# EAGLE board fabpdi-t90usb_v1.1 (EAGLE 8.2.2)
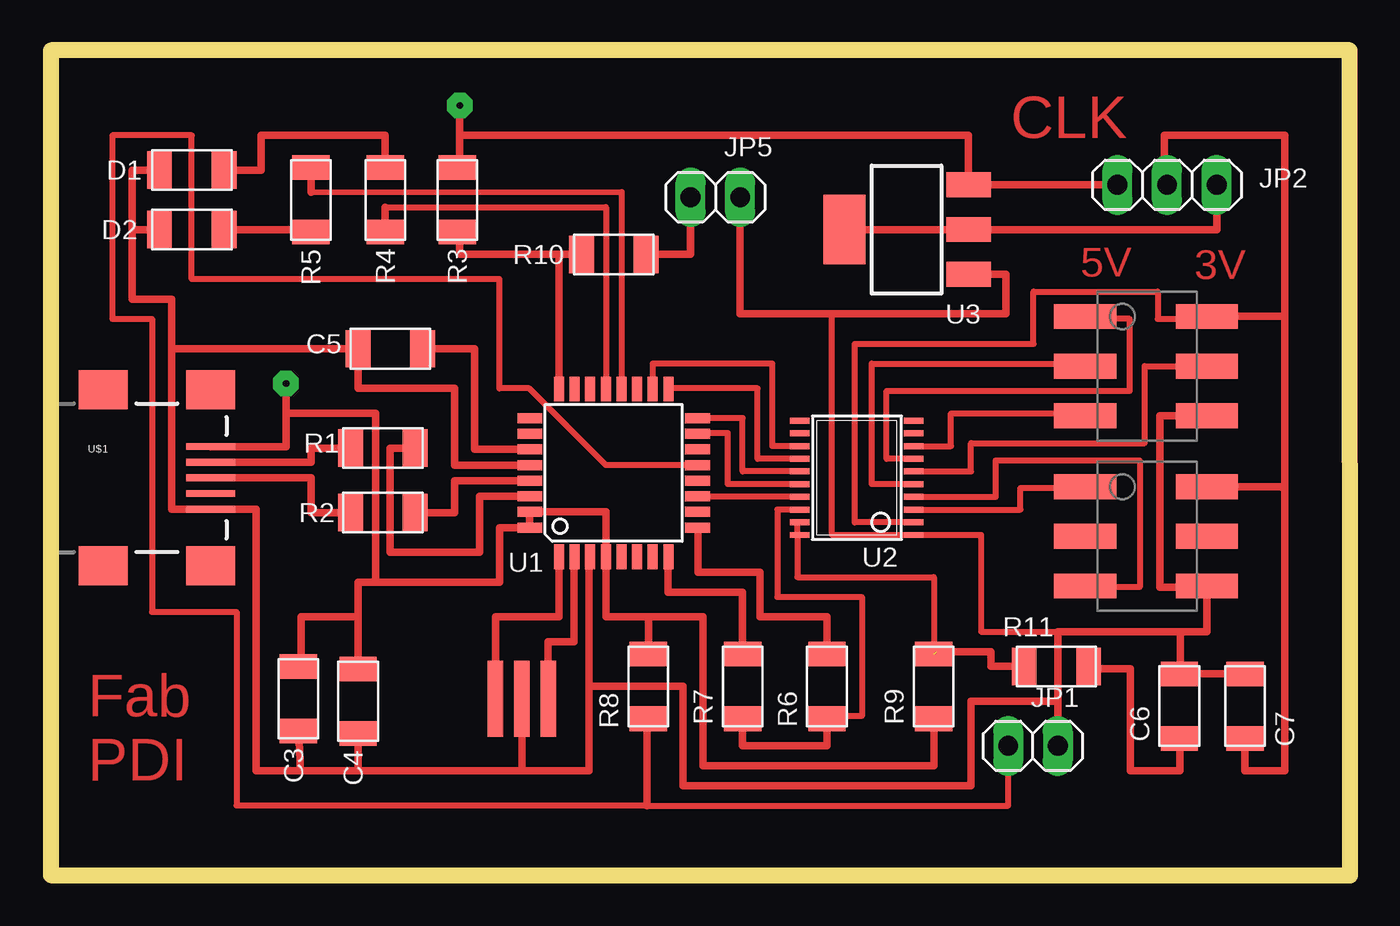
[diagram p0: board, top side]
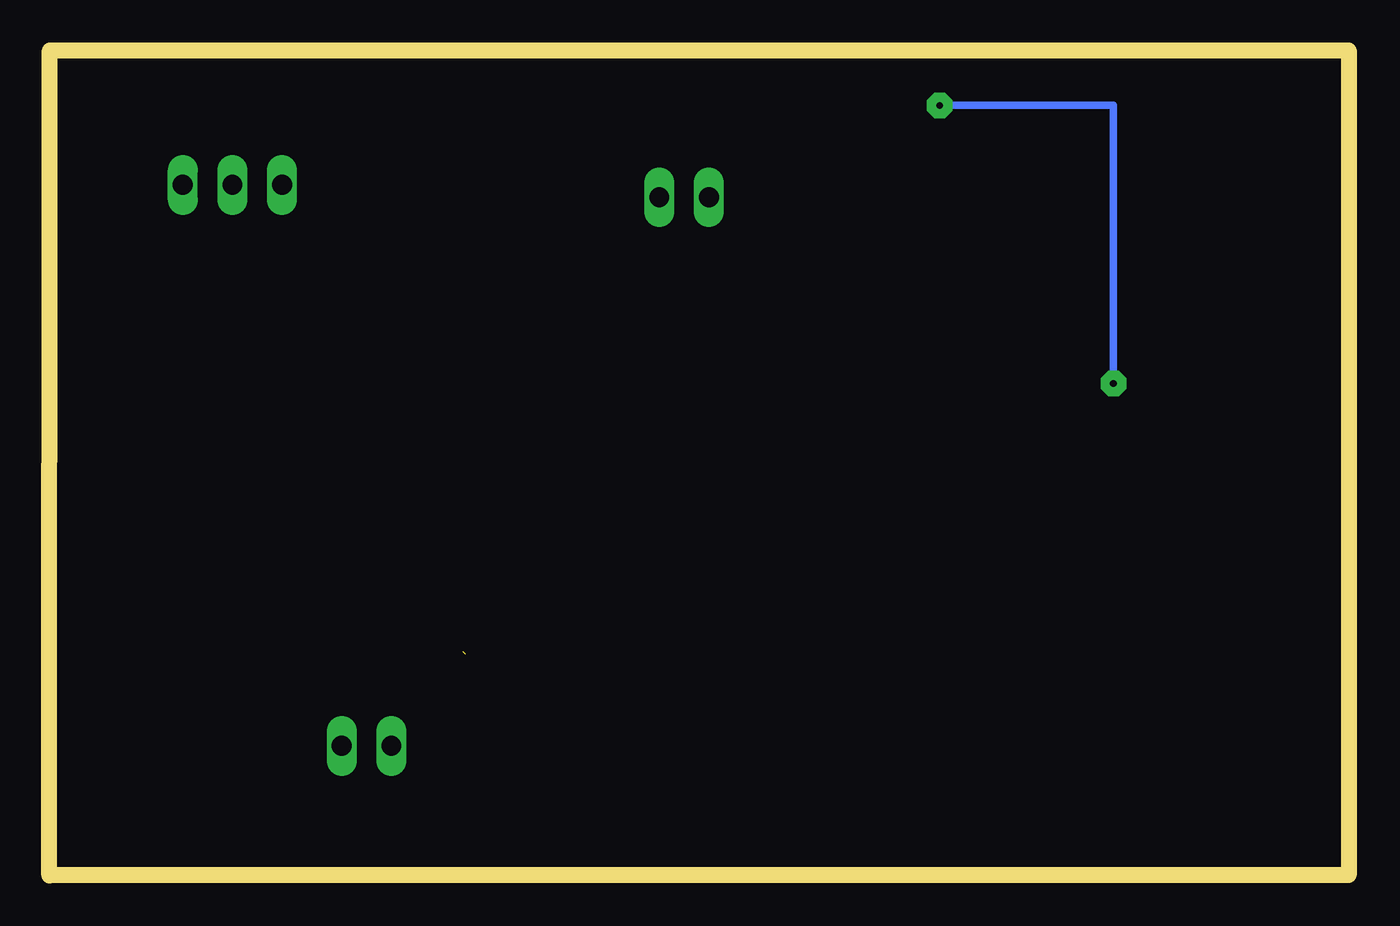
[diagram p1: board, bottom side, seen from below]

Size 66.5 x 42.21 mm. Coordinates in mm from the lower left corner, seen from the top.
Outline: 0,0.02 66.5,0 66.48,42.21 0,42.21 0,0.02
Copper layers (1*16): Top 0.035mm / dielectric 1.5mm / Bottom 0.035mm
Design rules "default *": minimum track width 6mil, minimum drill 0.35mm, track to track 10mil, track to pad 10mil, pad to pad 10mil, via to via 10mil, smd to smd 8mil, copper to edge 40mil, drill to drill 6mil, minimum pad ring 10mil, minimum via ring 8mil, stop-mask expansion 4mil, vias tented up to drill 0mil, thermal gap 10mil

## Footprints (pad centres in the part's own frame; a part is rotated, then mirrored left to right if it is on the bottom)
C1206FAB = smd 1.27 x 1.905: 1 -1.651,0; 2 1.651,0
LED1206FAB = smd 1.27 x 1.905: 1 -1.651,0; 2 1.651,0
1X02 = drill 1.016 long: 1 -1.27,0; 2 1.27,0
1X03 = drill 1.016 long: 1 -2.54,0; 2 0,0; 3 2.54,0
2X03SMD-FAB = smd 3.175 x 1.27: 1 -2.794,2.54; 2 3.429,2.54; 3 -2.794,0; 4 3.429,0; 5 -2.794,-2.54; 6 3.429,-2.54
R1206FAB = smd 1.27 x 1.905: 1 -1.651,0; 2 1.651,0
TQFP32-08 = smd 1.27 x 0.508: 1 -4.293,2.8; 2 -4.293,2; 3 -4.293,1.2; 4 -4.293,0.4; 5 -4.293,-0.4; 6 -4.293,-1.2; 7 -4.293,-2; 8 -4.293,-2.8; 17 4.293,-2.8; 18 4.293,-2; 19 4.293,-1.2; 20 4.293,-0.4; 21 4.293,0.4; 22 4.293,1.2; 23 4.293,2; 24 4.293,2.8 | smd 0.508 x 1.27: 9 -2.8,-4.293; 10 -2,-4.293; 11 -1.2,-4.293; 12 -0.4,-4.293; 13 0.4,-4.293; 14 1.2,-4.293; 15 2,-4.293; 16 2.8,-4.293; 25 2.8,4.293; 26 2,4.293; 27 1.2,4.293; 28 0.4,4.293; 29 -0.4,4.293; 30 -1.2,4.293; 31 -2,4.293; 32 -2.8,4.293
TSSOP20 = smd 0.305 x 0.991: 1 -2.925,-2.918; 2 -2.275,-2.918; 3 -1.625,-2.918; 4 -0.975,-2.918; 5 -0.325,-2.918; 6 0.325,-2.918; 7 0.975,-2.918; 8 1.625,-2.918; 9 2.275,-2.918; 10 2.925,-2.918; 11 2.925,2.918; 12 2.275,2.918; 13 1.625,2.918; 14 0.975,2.918; 15 0.325,2.918; 16 -0.325,2.918; 17 -0.975,2.918; 18 -1.625,2.918; 19 -2.275,2.918; 20 -2.925,2.918
SOT-223 = smd 1.27 x 2.286: 1 -2.286,-3.175; 2 0,-3.175; 3 2.286,-3.175 | smd 3.556 x 2.159: TER 0,3.175
USB_MINI = smd 2.5 x 0.35: D+ 3.77,0; D- 3.77,0.8; GND 3.77,-1.6; ID 3.77,-0.8; VBUS 3.77,1.6 | smd 2.5 x 2: SHIELD@1 -1.73,-4.5; SHIELD@2 -1.73,4.5; SHIELD@3 3.77,4.5; SHIELD@4 3.77,-4.5
EFOBM = smd 0.8 x 3.9: 1 -1.35,0; 2 0,0; 3 1.35,0

## Placement (x,y rotation side)
C3  0.1u  [C1206FAB]  12.67,9.04 90 top
C4  10u  [C1206FAB]  15.72,8.91 90 top
C5  1u  [C1206FAB]  17.37,26.94 0 top
C6  0.1u  [C1206FAB]  57.76,8.66 270 top
C7  0.1u  [C1206FAB]  61.11,8.66 270 top
D1  red  [LED1206FAB]  7.21,36.09 180 top
D2  green  [LED1206FAB]  7.21,33.04 180 top
JP1  [1X02]  50.27,6.62 180 top
JP2  [1X03]  57.12,35.33 0 top
JP3  ISP  [2X03SMD-FAB]  55.73,26.05 0 top
JP4  PDI  [2X03SMD-FAB]  55.73,17.34 0 top
JP5  [1X02]  34.01,34.69 0 top
R1  49  [R1206FAB]  16.99,21.86 0 top
R2  49  [R1206FAB]  16.99,18.56 0 top
R3  10k  [R1206FAB]  20.8,34.56 90 top
R4  1k  [R1206FAB]  17.12,34.56 90 top
R5  1k  [R1206FAB]  13.31,34.56 270 top
R6  49  [R1206FAB]  39.73,9.67 270 top
R7  49  [R1206FAB]  35.41,9.67 270 top
R8  1k  [R1206FAB]  30.58,9.67 90 top
R9  100k  [R1206FAB]  45.19,9.67 270 top
R10  0  [R1206FAB]  28.8,31.77 180 top
R11  0  [R1206FAB]  51.46,10.69 180 top
U1  AT90USB162A  [TQFP32-08]  28.8,20.59 90 top
U2  GTL2003PW  [TSSOP20]  41.25,20.34 90 top
U3  AMS1117-3.3  [SOT-223]  43.79,33.04 90 top
U$1  USB_MINI  [USB_MINI]  4.42,20.34 0 top
X1  16MHz  [EFOBM]  24.1,9.04 0 top

## Library data of the parts
C3-C7 D1 D2 JP3 JP4 R1-R11 U$1 X1 = 00fab
JP1 JP2 JP5 = pinhead
U1 = adafruit
U2 = gtl2003
U3 = Seeed-IC; MPN: CJT1117-3.3

## Nets
GND: C3.1 C4.1 C5.1 C6.1 C7.1 D1.2 D2.2 JP1.1 JP3.6 JP4.6 JP5.2 U1.3 U1.28 U2.1 U3.1 U$1.GND X1.2
N$1: R4.1 U1.21
N$2: C5.2 U1.27
N$3: U1.1 X1.1
N$4: U1.2 X1.3
N$5: R2.1 U$1.D+
N$6: R2.2 U1.29
N$7: R1.1 U$1.D-
N$8: R1.2 U1.30
N$9: R3.1 R10.2 U1.24
N$10: R5.1 U1.20
N$11: D1.1 R4.2
N$12: D2.1 R5.2
N$13: U1.11 U2.17
N$14: R6.1 U1.9
N$15: R7.1 U1.8
N$16: JP1.2 R8.1 U1.13
N$17: R6.2 R7.2 U2.18
N$18: U1.15 U2.16
N$19: U1.16 U2.15
N$20: U1.17 U2.14
N$21: U1.18 U2.13
N$22: R9.1 U2.20
N$23: JP3.1 U2.7
N$24: JP2.3 U3.2 U3.TER
N$25: JP3.3 U2.5
N$26: JP3.4 U2.6
N$27: JP3.5 U2.8
N$28: JP4.5 U2.4
N$29: JP4.1 U2.3
N$31: JP5.1 R10.1
V+: C7.2 JP2.2 JP3.2 JP4.2 U2.2
VCC: C3.2 C4.2 JP2.1 R3.2 R8.2 R9.2 U1.4 U1.31 U1.32 U3.3 U$1.VBUS

## Tracks (layer width: path | path; a pad name or v marks a point on that pad's centre or on a via)
GND
  Top 0.305: 39.98,28.72 39.98,17.41 U2.1 47.6,17.41 47.6,12.47 51.53,12.47
  Top 0.381: 12.75,5.35 10.52,5.35 10.52,18.74 U$1.GND 6.2,18.74 6.2,26.94 | 15.73,5.35 12.75,5.35 | C3.1 12.75,5.86 12.75,5.35 | C4.1 15.73,5.99 15.73,5.35 | 6.2,26.94 6.2,29.48 4.17,29.48 4.17,33.04 | 4.17,33.04 4.17,36.09 D1.2 | D2.2 4.17,33.04 | 6.2,26.94 C5.1 15.72,24.91 20.68,24.91 20.68,20.99 U1.28 | 24.11,5.35 15.73,5.35 | X1.2 24.11,9.54 24.11,5.35 | U1.3 27.53,16.3 27.53,9.67 | 27.53,9.67 27.53,5.35 24.11,5.35 | 27.53,9.67 32.36,9.67 32.36,4.59 47.09,4.59 47.09,8.91 51.53,8.91 | C6.1 57.81,10.31 | C7.1 57.81,10.31 | 57.81,10.31 57.81,12.47 | 57.81,12.47 51.53,12.47 51.53,8.91 | U3.1 48.87,30.75 48.87,28.72 39.98,28.72 35.28,28.72 JP5.2 | JP1.1 51.54,8.15 51.53,8.91 | 57.81,12.47 59.16,12.47 59.16,14.71 59.16,14.75 | 59.16,14.75 JP4.6 | JP3.6 56.77,23.52 56.77,14.75 59.16,14.75
N$1
  Top 0.305: 17.12,34.18 28.4,34.18 U1.21
  Top 0.381: R4.1 17.12,34.18
N$2
  Top 0.381: U1.27 21.69,21.79 21.69,26.94 C5.2
N$3
  Top 0.381: U1.1 26.01,13.23 22.75,13.23 X1.1
N$4
  Top 0.381: U1.2 26.77,16.3 26.77,11.96 25.45,11.96 X1.3
N$5
  Top 0.381: U$1.D+ 13.31,20.34 13.31,18.56 R2.1
N$6
  Top 0.381: U1.29 20.68,20.19 20.68,18.56 R2.2
N$7
  Top 0.381: U$1.D- 13.31,21.14 13.31,21.86 R1.1
N$8
  Top 0.381: U1.30 21.95,19.39 21.95,16.53 17.37,16.53 17.37,21.86 R1.2
N$9
  Top 0.381: R3.1 20.93,32.91 20.93,31.77 26.02,31.77 | U1.24 26.02,24.89 26.02,31.77 | R10.2 26.02,31.77
N$10
  Top 0.305: 13.31,34.95 29.21,34.97 U1.20
  Top 0.381: R5.1 13.31,34.95
N$11
  Top 0.381: D1.1 10.77,36.09 10.77,37.87 17.12,37.87 R4.2
N$12
  Top 0.381: D2.1 13.31,33.04 R5.2
N$13
  Top 0.305: U2.17 33.1,19.36 U1.11
N$14
  Top 0.381: U1.9 33.12,17.79 33.12,15.51 36.3,15.51 36.3,13.23 39.73,13.23 R6.1
N$15
  Top 0.381: U1.8 31.6,14.5 35.41,14.5 R7.1
N$16
  Top 0.305: U1.13 28.4,20.99 24.49,24.91 22.96,24.91 22.96,30.5 7.21,30.5 7.21,37.87 3.15,37.87 3.15,28.47 5.18,28.47 5.18,13.48 9.5,13.48 9.5,3.58 30.51,3.58 49,3.58 JP1.2
  Top 0.381: R8.1 30.51,8.02 30.51,3.58
N$17
  Top 0.305: U2.18 37.19,18.71 37.19,14.24 41.5,14.24 41.5,8.15 39.73,8.15 39.73,6.7
  Top 0.381: R7.2 35.41,6.62 39.73,6.62 39.73,6.7 R6.2
N$18
  Top 0.305: U2.16 34.65,20.02 34.65,22.63 33.1,22.63 U1.15
N$19
  Top 0.305: U2.15 35.41,20.66 35.41,23.39 U1.16
N$20
  Top 0.305: U2.14 36.17,21.32 36.17,24.91 31.6,24.91 U1.17
N$21
  Top 0.305: U2.13 36.93,21.96 36.93,26.18 30.8,26.18 U1.18
N$22  (1 unrouted)
  Top 0.305: U2.20 38.2,17.41 38.2,15.26 45.19,15.26 R9.1
  Top 0.381: 45.31,11.45 48.11,11.45 48.11,10.69 50.14,10.69
N$23
  Top 0.305: U2.7 42.77,21.32 42.77,24.79 55.22,24.79 55.22,28.47 52.93,28.47 JP3.1
N$24
  Top 0.381: U3.TER U3.2 59.66,33.04 JP2.3
N$25
  Top 0.305: U2.5 42.01,20.02 42.01,26.18 52.93,26.18 JP3.3
N$26
  Top 0.305: U2.6 47.09,20.66 47.09,22.12 55.98,22.12 55.98,26.05 JP3.4
N$27
  Top 0.305: U2.8 46.08,21.96 46.08,23.64 52.93,23.64 JP3.5
N$28
  Top 0.305: U2.4 48.36,19.36 48.36,21.23 55.73,21.23 55.73,14.75 52.93,14.75 JP4.5
N$29
  Top 0.305: U2.3 49.63,18.71 49.63,19.83 52.93,19.83 JP4.1
N$30
  Top 0.381: 53.34,10.56 55.24,10.56 55.24,5.35 57.78,5.35 57.78,7
N$31
  Top 0.381: R10.1 32.74,31.77 JP5.1
S$1
  Top 0.102: 0,0.02 66.42,0.02 66.42,42.18 0,42.18 0,0.02
S$2
  Top 0.305: 38.2,17.55 38.2,18.05
V+
  Top 0.305: 59.16,19.83 JP4.2 | JP3.2 59.16,28.47 56.64,28.47 56.64,29.86 50.29,29.86 50.29,27.2 41.15,27.2 41.15,18.07 U2.2
  Top 0.381: C7.2 61.11,5.35 63.14,5.35 63.14,19.76 | JP2.2 57,35.33 57,37.87 63.14,37.87 63.14,28.59 | 63.14,19.76 63.14,28.59 | JP3.2 63.14,28.59 | JP4.2 62.89,19.88 63.14,19.76
VCC  (via drill 0.35 pad 1.3)
  Top 0.305: 46.97,35.58 U3.3
  Top 0.381: U$1.VBUS 12.04,21.94 12.04,23.64 | 12.04,23.64 16.61,23.64 16.61,15.01 | 16.61,15.01 15.72,15.01 15.72,13.23 | 15.72,13.23 C4.2 | C3.2 12.8,10.43 12.8,13.23 15.72,13.23 | 16.61,15.01 22.96,15.01 22.96,17.79 U1.32 U1.31 28.4,18.59 U1.4 28.4,13.23 30.58,13.23 | R3.2 20.93,36.22 20.93,37.87 | 20.93,37.87 20.92,37.87 v20.93,39.39 | 20.93,37.87 46.97,37.87 U3.3 JP2.1 | 12.04,23.64 v12.04,25.17 | 30.58,13.23 R8.2 | 30.58,13.23 33.38,13.23 33.38,5.61 45.19,5.61 R9.2
  Bottom 0.381: v12.04,25.17 12.04,39.39 v20.93,39.39

## Text on the board
Top: CLK | 5V | 3V | Fab / PDI
tDocu: RST | HWB